# EAGLE board ori2[206] (EAGLE 9.2.0)
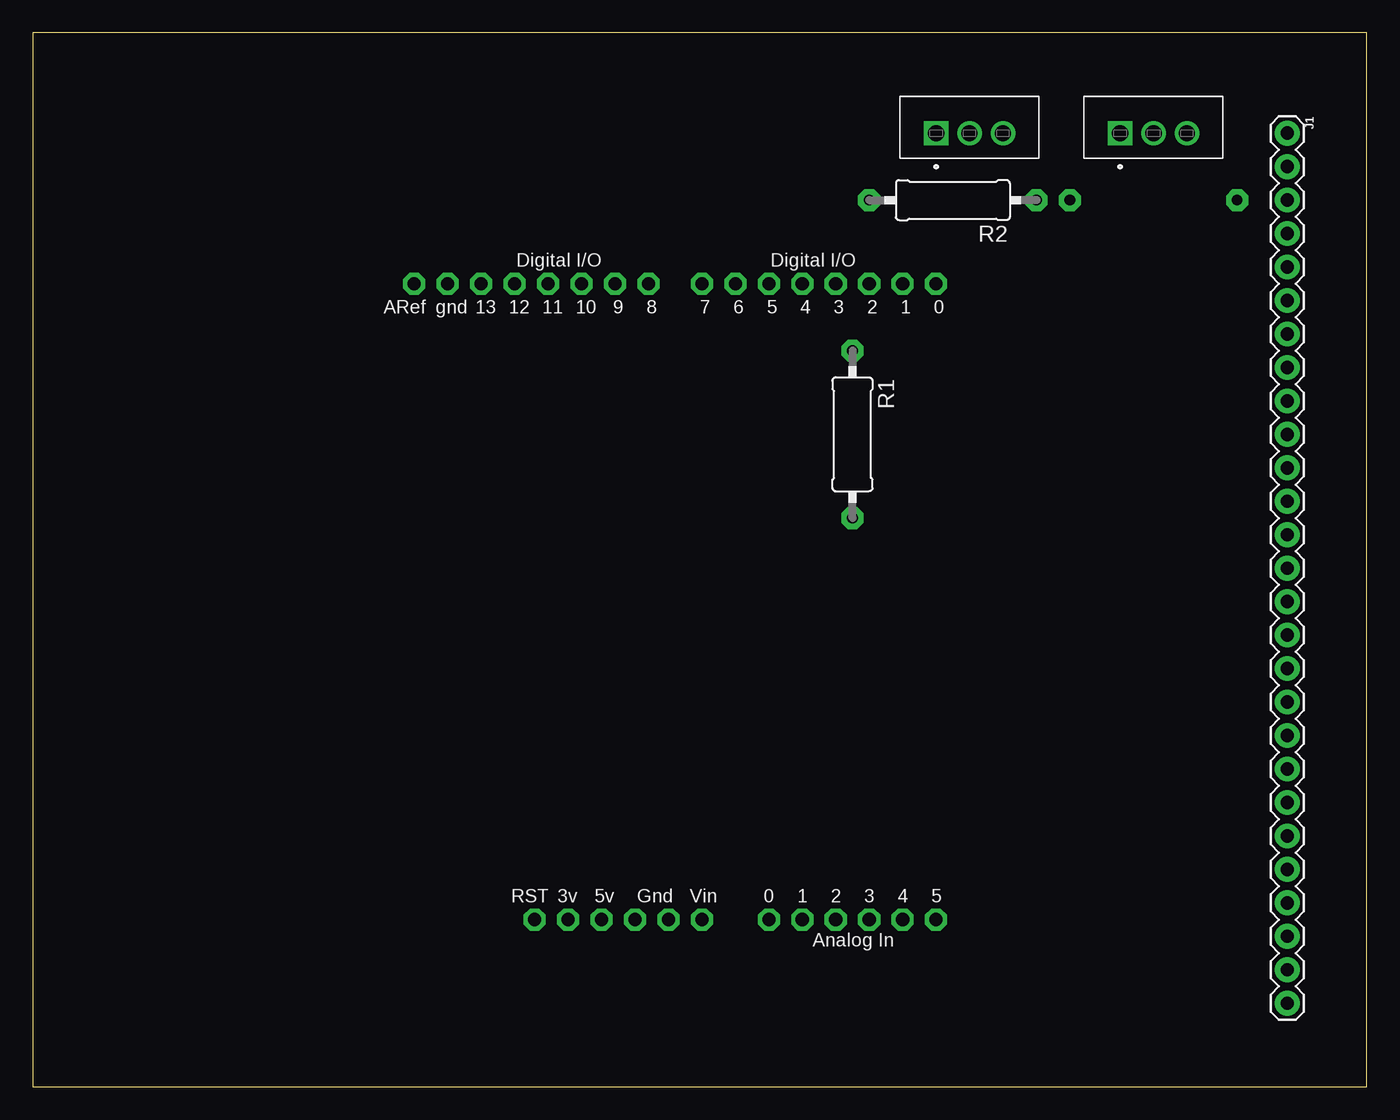
[diagram p0: board, top side]
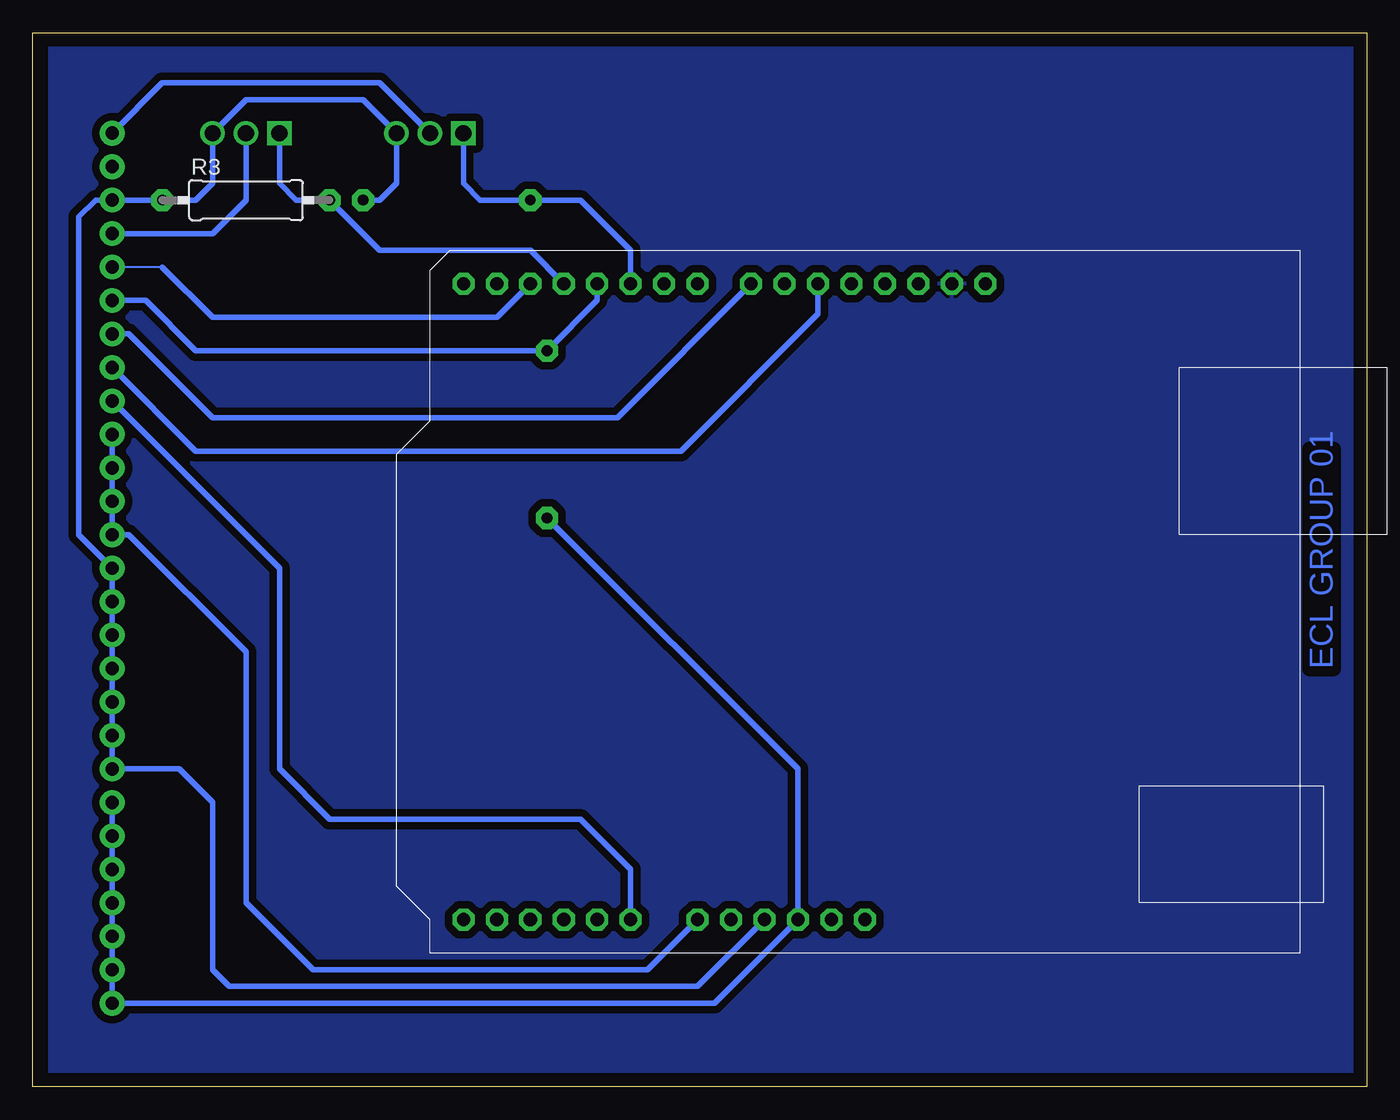
[diagram p1: board, bottom side, seen from below]

Size 101.27 x 80 mm. Coordinates in mm from the lower left corner, seen from the top.
Outline: 0,0 101.27,0 101.27,80 0,80 0,0
Copper layers (1*16): Top 0.035mm / dielectric 1.5mm / Bottom 0.035mm
Design rules "default *": minimum track width 50mil, minimum drill 0.35mm, track to track 12mil, track to pad 25mil, pad to pad 25mil, via to via 25mil, smd to smd 6mil, copper to edge 40mil, drill to drill 6mil, minimum pad ring 10mil, minimum via ring 8mil, stop-mask expansion 4mil, vias tented up to drill 0mil, thermal gap 10mil
Net classes: 0 default: width 0.762 mm, drill 0.178 mm, clearance 0.584 mm

## Footprints (pad centres in the part's own frame; a part is rotated, then mirrored left to right if it is on the bottom)
ARDUINO-NOHOLE = drill 1 pad 1.676 octagon: 3V 35.56,2.54; 5V 38.1,2.54; A0 50.8,2.54; A1 53.34,2.54; A2 55.88,2.54; A3 58.42,2.54; A4 60.96,2.54; A5 63.5,2.54; AREF 23.876,50.8; D0 63.5,50.8; D1 60.96,50.8; D2 58.42,50.8; D3 55.88,50.8; D4 53.34,50.8; D5 50.8,50.8; D6 48.26,50.8; D7 45.72,50.8; D8 41.656,50.8; D9 39.116,50.8; D10 36.576,50.8; D11 34.036,50.8; D12 31.496,50.8; D13 28.956,50.8; GND 26.416,50.8; GND1 43.18,2.54; GND2 40.64,2.54; RESET 33.02,2.54; VIN 45.72,2.54
1X27 = drill 1.016 pad 1.88: 1 0,0; 2 2.54,0; 3 5.08,0; 4 7.62,0; 5 10.16,0; 6 12.7,0; 7 15.24,0; 8 17.78,0; 9 20.32,0; 10 22.86,0; 11 25.4,0; 12 27.94,0; 13 30.48,0; 14 33.02,0; 15 35.56,0; 16 38.1,0; 17 40.64,0; 18 43.18,0; 19 45.72,0; 20 48.26,0; 21 50.8,0; 22 53.34,0; 23 55.88,0; 24 58.42,0; 25 60.96,0; 26 63.5,0; 27 66.04,0
TO-220 = drill 1.23 pad 1.85: D 2.54,0; S 5.08,0 | drill 1.23 pad 1.85 square: G 0,0
0309/12 = drill 0.813 pad 1.676 octagon: 1 -6.35,0; 2 6.35,0

## Placement (x,y rotation side)
B1  ARDUINO-NOHOLE  [ARDUINO-NOHOLE]  5.08,10.16 0 top
J1  [1X27]  95.25,72.39 270 top
Q1  IRF520NPBF  [TO-220]  82.55,72.39 0 top
Q2  IRF520NPBF  [TO-220]  68.58,72.39 0 top
R1  [0309/12]  62.23,49.53 270 top
R2  [0309/12]  69.85,67.31 180 top
R3  [0309/12]  85.09,67.31 0 bottom

## Library data of the parts
B1 R1-R3 = adafruit
J1 = SparkFun-Connectors
Q1 Q2 = Transistor; CREATED_BY: PCBLayout.com; DIGIKEY_PART_NUMBER: IRF520NPBF-ND; MANUFACTURER: Infineon Technologies; MPN: IRF520NPBF; PACKAGE: TO-220

## Nets
3V: B1.3V
GND: B1.GND
GND1: B1.GND1
N$1: B1.5V J1.21 J1.22 J1.23 J1.24 J1.25 J1.26 J1.27 R1.2
N$2: B1.GND2 J1.3 J1.14 J1.15 J1.16 J1.17 J1.18 J1.19 J1.20 Q1.S Q2.S R2.1 R3.1
N$3: B1.A0 J1.9
N$4: B1.VIN J1.10 J1.11 J1.12 J1.13
N$5: B1.D2 J1.5
N$7: B1.D5 Q2.G R2.2
N$9: B1.D3 Q1.G R3.2
N$10: J1.4 Q1.D
N$11: B1.D4 J1.6 R1.1
N$12: J1.1 Q2.D
N$13: B1.D8 J1.7
N$14: B1.D10 J1.8

## Tracks (layer width: path | path; a pad name or v marks a point on that pad's centre or on a via)
GND
  pour Bottom: 0,80.01 0,0 99.95,0 99.95,80.01
N$1
  Bottom 0.406: J1.21 J1.22 J1.23 J1.24 J1.25 J1.26 J1.27 49.53,6.35 B1.5V 43.18,24.13 R1.2
N$2
  Bottom 0.406: R2.1 74.93,67.31 73.66,68.58 Q2.S 76.2,74.93 85.09,74.93 Q1.S 87.63,68.58 88.9,67.31 R3.1 J1.3 96.52,67.31 97.79,66.04 97.79,41.91 J1.14 J1.15 J1.16 J1.17 J1.18 J1.19 J1.20 90.17,24.13 87.63,21.59 87.63,8.89 86.36,7.62 50.8,7.62 B1.GND2
N$3
  Bottom 0.406: B1.A0 55.88,16.51 59.69,20.32 78.74,20.32 82.55,24.13 82.55,39.37 J1.9
N$4
  Bottom 0.406: B1.VIN 54.61,8.89 80.01,8.89 85.09,13.97 85.09,33.02 93.98,41.91 J1.13 J1.12 J1.11 J1.10
N$5
  Bottom 0.152: 91.44,62.23 J1.5
  Bottom 0.406: B1.D2 66.04,58.42 87.63,58.42 91.44,62.23
N$7
  Bottom 0.406: B1.D5 55.88,63.5 59.69,67.31 R2.2 67.31,67.31 68.58,68.58 Q2.G
N$9
  Bottom 0.406: B1.D3 63.5,63.5 74.93,63.5 R3.2 81.28,67.31 82.55,68.58 Q1.G
N$10
  Bottom 0.406: J1.4 87.63,64.77 85.09,67.31 Q1.D
N$11
  Bottom 0.406: B1.D4 58.42,59.69 R1.1 88.9,55.88 92.71,59.69 J1.6
N$12
  Bottom 0.406: Q2.D 74.93,76.2 91.44,76.2 J1.1
N$13
  Bottom 0.406: B1.D8 56.9,50.8 87.63,50.8 93.98,57.15 J1.7
N$14
  Bottom 0.406: B1.D10 41.66,58.67 52.07,48.26 88.9,48.26 J1.8

## Text on the board
Bottom: ECL GROUP 01